# EAGLE board adxl345 (EAGLE 7.5.0)
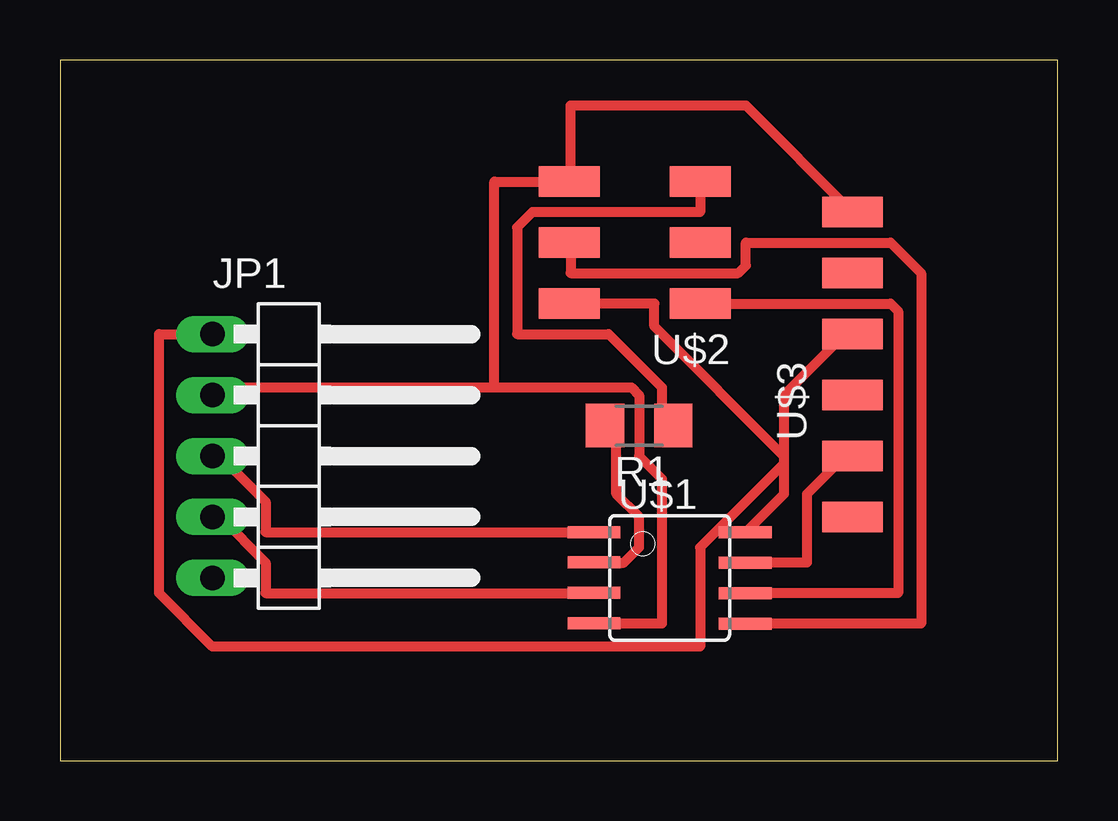
[diagram p0: board, top side]

Size 41.58 x 29.2 mm. Coordinates in mm from the lower left corner, seen from the top.
Outline: 0,0 41.58,0 41.58,29.2 0,29.2 0,0
Copper layers (1*16): Top 0.035mm / dielectric 1.5mm / Bottom 0.035mm
Design rules "default *": minimum track width 16mil, minimum drill 24mil, track to track 16mil, track to pad 16mil, pad to pad 16mil, via to via 8mil, smd to smd 0mil, copper to edge 40mil, drill to drill 8mil, minimum pad ring 10mil, minimum via ring 8mil, stop-mask expansion 4mil, vias tented up to drill 0mil, thermal gap 10mil

## Footprints (pad centres in the part's own frame; a part is rotated, then mirrored left to right if it is on the bottom)
1X05/90 = drill 1.016 long: 1 -5.08,-3.81; 2 -2.54,-3.81; 3 0,-3.81; 4 2.54,-3.81; 5 5.08,-3.81
R1206 = smd 1.6 x 1.803: 1 -1.422,0; 2 1.422,0
SOIC8 = smd 0.5 x 2.2: 1 -1.905,-3.154; 2 -0.645,-3.154; 3 0.625,-3.154; 4 1.895,-3.154; 5 1.905,3.154; 6 0.635,3.154; 7 -0.635,3.154; 8 -1.905,3.154
2X03SMD = smd 2.54 x 1.27: 1 -2.54,2.54; 2 2.92,2.54; 3 -2.54,0; 4 2.92,0; 5 -2.54,-2.54; 6 2.92,-2.54
1X06SMD = smd 2.54 x 1.27: 1 0,6.35; 2 0,3.81; 3 0,1.27; 4 0,-1.27; 5 0,-3.81; 6 0,-6.35

## Placement (x,y rotation side)
JP1  [1X05/90]  10.16,12.7 270 top
R1  [R1206]  24.13,13.97 180 top
U$1  ATTINY45SI  [SOIC8]  25.4,7.62 270 top
U$2  AVRISPSMD  [2X03SMD]  24.13,21.59 180 top
U$3  FTDI-SMD-HEADER  [1X06SMD]  33.02,16.51 0 top

## Library data of the parts
JP1 = pinhead
R1 U$1-U$3 = fab

## Nets
3.3V: JP1.5
GND: JP1.2 U$1.4 U$2.6 U$3.1
MISO: U$1.6 U$2.1
MOSI: U$1.5 U$2.4
N$2: R1.2 U$1.2
N$15: U$3.2
RST: R1.1 U$2.5
RTS: U$3.6
RX: U$1.7 U$3.5
SCK: U$2.3
SCL: JP1.3 U$1.1
SDA: JP1.4 U$1.3
TX: U$3.4
VCC: JP1.1 U$1.8 U$2.2 U$3.3

## Tracks (layer width: path | path; a pad name or v marks a point on that pad's centre or on a via)
GND
  Top 0.406: 18.1,15.56 6.35,15.56 JP1.2 | 18.1,15.56 23.81,15.56 24.13,15.24 24.13,12.7 25.08,11.75 25.08,5.72 22.54,5.72 U$1.4 | 18.1,15.56 18.1,24.13 U$2.6 21.27,24.13 21.27,27.31 28.58,27.31 U$3.1
MISO
  Top 0.406: U$1.6 34.93,6.99 34.93,18.73 34.61,19.05 U$2.1
MOSI
  Top 0.406: U$1.5 35.88,5.72 35.88,20.32 34.61,21.59 28.58,21.59 28.58,20.64 28.26,20.32 21.27,20.32 21.27,21.59 U$2.4
N$2
  Top 0.406: R1.2 22.86,13.97 23.18,13.65 23.18,11.11 24.13,10.16 24.13,8.89 23.5,8.26 22.54,8.26 U$1.2
RST
  Top 0.406: U$2.5 26.67,22.86 19.69,22.86 19.05,22.23 19.05,17.78 22.86,17.78 25.08,15.56 25.08,14.29 25.4,13.97 R1.1
RX
  Top 0.406: U$1.7 31.12,8.26 31.12,11.11 32.7,12.7 U$3.5
SCL
  Top 0.406: U$1.1 8.57,9.53 8.57,10.8 6.67,12.7 JP1.3
SDA
  Top 0.406: JP1.4 6.67,10.16 8.57,8.26 8.57,6.99 22.23,6.99 U$1.3
VCC
  Top 0.406: 30.16,12.7 30.16,15.24 32.7,17.78 U$3.3 | 30.16,12.7 30.16,12.38 | 30.16,12.38 30.16,11.11 28.58,9.53 U$1.8 | U$2.2 24.77,19.05 24.77,18.1 30.16,12.7 | JP1.1 4.13,17.78 4.13,6.99 6.35,4.76 26.67,4.76 26.67,8.89 30.16,12.38